# Altium PCB WX0.012.817PCB-4.1.PcbDoc
Units mil, origin at the board's own origin, x right, y up, seen from the top; angles counter-clockwise.
Board outline 4685.04 x 1692.91 mil, 2 copper layers (Top Layer, Bottom Layer); 24 components, 15 nets, 67 pads, 117 vias.
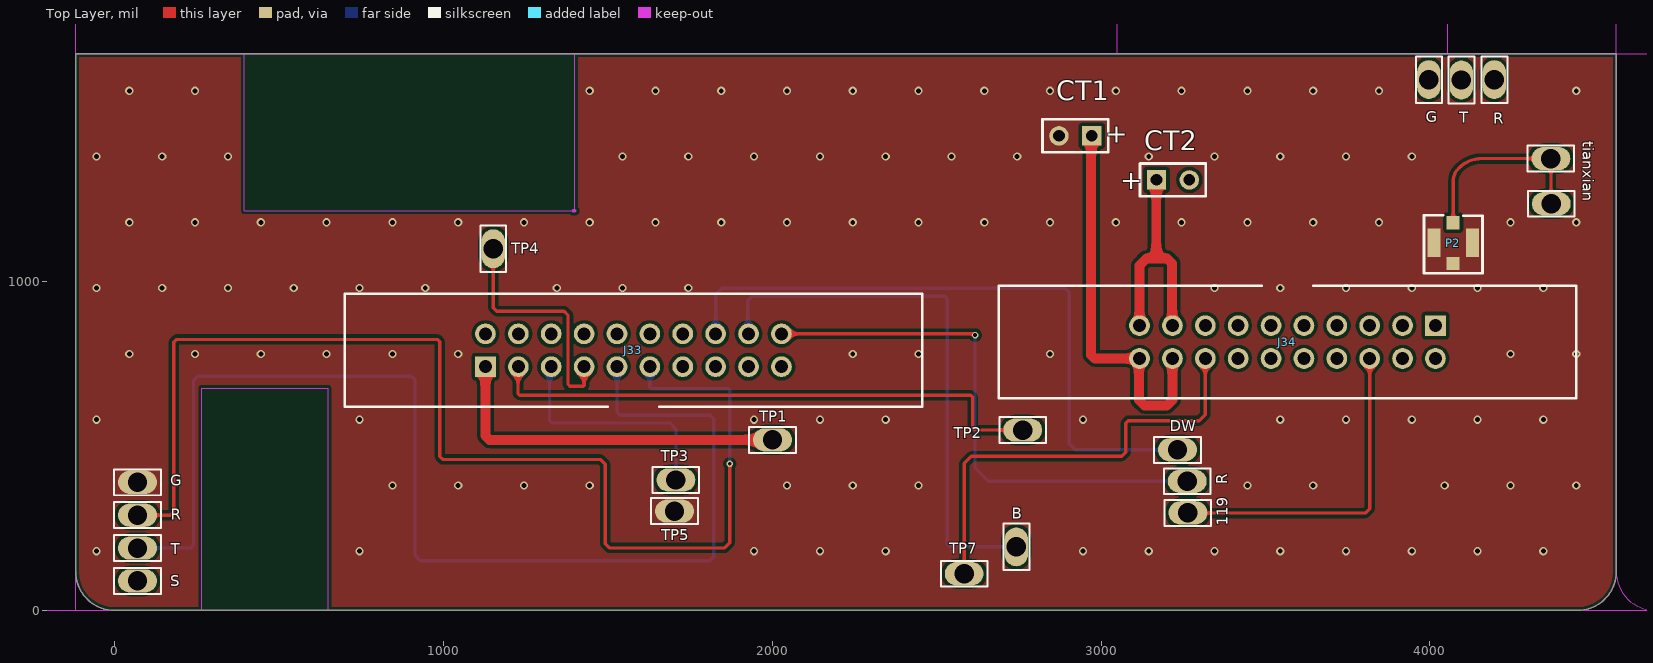
[diagram p0: Top Layer view]
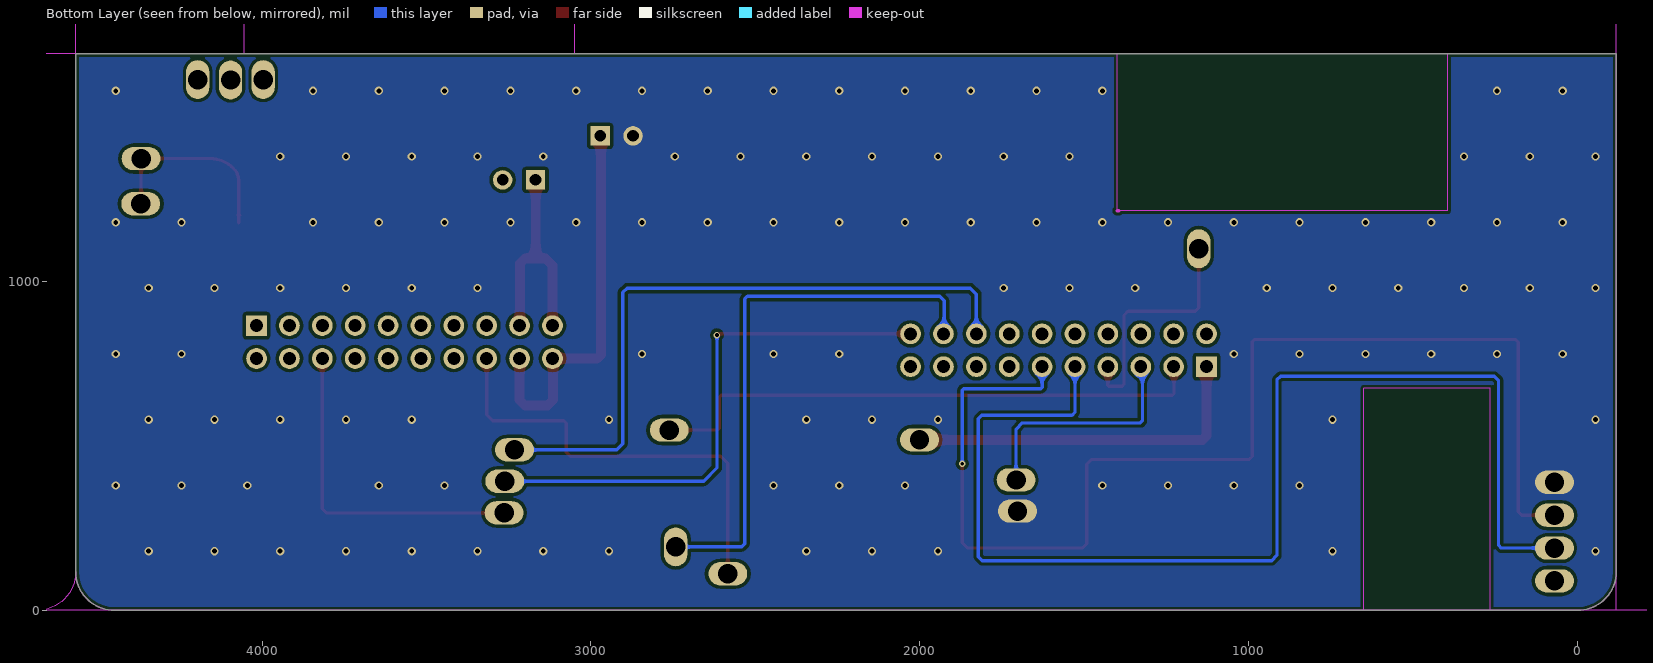
[diagram p1: Bottom Layer view, seen from below]

## Layer stack, top to bottom
Top Solder: solder mask 0.4, Solder Resist, Dk 3.5
Top Layer: signal copper 1.4
Dielectric 1: dielectric 12.6, FR-4, Dk 4.8
Bottom Layer: signal copper 1.4
Bottom Solder: solder mask 0.4, Solder Resist, Dk 3.5

## Board outline
0,0 cw(c0,118.11) -118.11,118.11 -118.11,1692.91 4566.93,1692.91 4566.93,118.11 cw(c4448.82,118.11) 4448.82,0

## Design rules (kind name [scope] priority, off if disabled: settings)
Clearance [All] p1: gap=10 ignorepadtopadclearanceinfootprint=TRUE except(0: Arc-Hole Track-Hole SMDPad-Hole THPad-Hole Via-Hole Fill-Hole Poly-Hole Region-Hole Text-Hole)
HoleToHoleClearance [All] p1: gap=3 allowstackedmicrovias=TRUE
MinimumSolderMaskSliver [All] p1: minsoldermaskwidth=3
PlaneConnect [All] p1: planeconnectstyle=Direct reliefexpansion=20 reliefentries=4 reliefconductorwidth=10 reliefairgap=10
PolygonConnect [All] p1: connectstyle=Direct reliefconductorwidth=10 reliefentries=4 polygonreliefangle="90 Angle" airgapwidth=10
RoutingVias [All] p1: holewidth=11.81 width=19.68 viastyle="Through Hole" minholewidth=10 minwidth=10 maxholewidth=28 maxwidth=50
SilkToSilkClearance [All] p1: silktosilkclearance=3
SilkToSolderMaskClearance [IsPad] p1: minsilkscreentomaskgap=0 clearancetoexposedcopper=TRUE
SolderMaskExpansion [All] p1: expansion=4
Width [All] p1: maxlimit=50 minlimit=10 preferedwidth=10
25 further rules are at their usual default settings.

## Components (designator, comment, footprint, x,y, rotation, side; value= is the part's Value field where it differs from the comment)
119 "Test Point" TP5 3264.2,296.62 r270 top (schematic designator TP7)
B "Test Point" TP5 2742.39,193.2 r0 top (schematic designator TP7)
CT1 "BAT" BAT2 2921.53,1443.05 r180 top
CT2 "BAT" BAT2 3219,1309 r0 top (schematic designator CT1)
DW "Test Point" TP5 3232.39,488.2 r90 top (schematic designator TP7)
G "Test Point" TP5 69.82,389.53 r270 top (schematic designator TP7)
G "Test Point" TP5 3997,1614 r180 top (schematic designator TP7)
J33 "20Pin" DC254_2*10 1578,791 r90 top
J34 "20Pin" DC254_2*10 3567,816 r270 top (schematic designator J33)
P2 "IPEX" ANT-IPEX 4070.93,1179.02 r180 top (schematic designator P1)
R "Test Point" TP5 3262.2,392.62 r270 top (schematic designator TP7)
R "Test Point" TP5 69.82,289.53 r270 top (schematic designator TP7)
R "Test Point" TP5 4196,1614 r180 top (schematic designator TP7)
S "Test Point" TP5 69.82,89.53 r270 top (schematic designator TP7)
T "Test Point" TP5 69.82,189.53 r270 top (schematic designator TP7)
T "Test Point" TP5 4096,1613 r180 top (schematic designator TP7)
tianxian "Test Point" TP5 4368,1374 r270 top (schematic designator TP7)
TP1 "Test Point" TP5 2000.8,518.38 r90 top (schematic designator TP7)
TP2 "Test Point" TP5 2761.8,548.38 r90 top (schematic designator TP7)
TP3 "Test Point" TP5 1707.2,396.62 r270 top (schematic designator TP7)
TP4 "Test Point" TP5 1151.61,1099.8 r180 top (schematic designator TP7)
TP5 "Test Point" TP5 1703,302 r270 top (schematic designator TP7)
TP7 "Test Point" TP5 2583.8,111.38 r90 top
TP7 "Test Point" TP5 4369.2,1236.61 r270 top

## Footprints (in the part's own frame and the unit in brackets; to place one, negate y for a bottom-side part, rotate by r counter-clockwise, add the part's x,y. Pads: shape width x height; smd on the part's side, far side on the other; paste and mask are expansions set on the pad)
ANT-IPEX [mm] "IPX天线座"
  rect 1x1.05 smd: 1(0,0)
  rect 1x2.2 smd: 2(-1.475,1.55) 2(1.475,1.55)
  rect 1x1 smd: 2(0,3.151)
  silkscreen extent -2.26,-0.56 2.26,3.9
BAT2 [mm]
  rect 1.5x1.5 hole 0.9: 1(-1.282,0.001)
  round 1.5 hole 0.9: 2(1.258,0.001)
  silkscreen extent -2.55,-1.27 2.53,1.27
DC254_2*10 [mm]
  rect 1.6x1.6 hole 1: 1(-1.27,11.43)
  round 1.6 hole 1: 2(1.27,11.43) 3(-1.27,8.89) 4(1.27,8.89) 5(-1.27,6.35) 6(1.27,6.35) 7(-1.27,3.81) 8(1.27,3.81) 9(-1.27,1.27) 10(1.27,1.27) 11(-1.27,-1.27) 12(1.27,-1.27) 13(-1.27,-3.81) 14(1.27,-3.81) 15(-1.27,-6.35) 16(1.27,-6.35) 17(-1.27,-8.89) 18(1.27,-8.89) 19(-1.27,-11.43) 20(1.27,-11.43)
  silkscreen extent -4.35,-22.3 4.35,22.3
TP5 [mm]
  oval 1.8x3 hole 1.5: 1(0,0)
  silkscreen extent -1,-1.8 1,1.8

## Part data
119 B DW G G R R R S T T tianxian TP1 TP2 TP3 TP4 TP5 TP7 TP7: library part "Test Point  PASS", "测试点"
CT1 CT2: "电池"
J33 J34: library part 1010902-0139, "DC2 2.54mm 2x10pin,2.54mm间距，2x10pin，32×8.55×27.5mm,母头,双排,双排牛角座", Part Name=DC牛角座, ID=4, Part Number=1010902-0139, SMD/DIP=DIP

## Via types
v1: diameter 25, hole 15, Top Layer to Bottom Layer, tented both sides, 115 vias
v2: diameter 19.68, hole 11.81, Top Layer to Bottom Layer, tented both sides, 2 vias

## Nets (pads, with @x,y where several pads share a name; then routed paths per layer and width w, separated by ;. In a path a pad name is that pad's centre, name@x,y a point inside that pad or via, vN(x,y) a via of type N, cw(c..) or ccw(c..) an arc to the next point about the centre after c; other vN are vias at no path point)
3.3V: J33.7 TP4.1 | length 736
  Top Layer w10: TP4.1 1151.61,920.39 1162,910 1367,910 1379,898 1379,687 1384,682 1426,682 1428,684 J33.7
3.6V: J34.16 TP7.1@2583.8,111.38 | length 1352.5
  Top Layer w10: TP7.1@2583.8,111.38 2583.8,446.8 2606,469 3063,469 3075,481 3075,569 3083,577 3299,577 3317,595 J34.16
5V: J33.3 TP2.1 | length 1718.1
  Top Layer w10: J33.3 1227,740 1227,659 1232,654 2604,654 2610,648 2610,554 2615.61,548.38 TP2.1
5V1: J33.5 TP3.1 | length 715.9
  Bottom Layer w10: J33.5 1323,736 1323,576 1329,570 1688,570 1707.2,550.8 TP3.1
12out2: CT2.1 J34.17 J34.19 | length 725.6
  Top Layer w30: J34.19 3117,1049 3138,1070 3168,1070 ; CT2.1 3168,1308.52 3168,1070 ; J34.17 3216,867 3216,1055 3201,1070 3168,1070
12Vout1: CT1.1 J34.18 J34.20 | length 1187.3
  Top Layer w30: CT1.1 2970,1441 2970,777 2981,766 J34.20 3115,764 3115,640 3132,623 3200,623 3217,640 J34.18
119: 119.1 J34.6 | length 1015.4
  Top Layer w10: 119.1 3264.81,296 3804,296 3817,309 J34.6
B: B.1 J33.18 | length 1675
  Bottom Layer w10: J33.18 1926,843 1926,942 1939,955 2524,955 2532,947 2532,203 2541.8,193.2 B.1
DW: DW.1 J33.16 | length 2006
  Bottom Layer w10: J33.16 1828,962 1846,980 2890,980 2903,967 2903,507 2921.8,488.2 DW.1
GND: CT1.2 G.1@69.82,389.53 P2.2 TP5.1
  other v1: -55,180 745,180 1945,180 2145,180 2345,180 2945,180 3145,180 3345,180 3545,180 3745,180 3945,180 4145,180 4345,180 845,380 1045,380 1245,380 1445,380 2045,380 2245,380 2445,380 3445,380 3645,380 4045,380 4245,380 4445,380 -55,580 745,580 1945,580 2145,580 2345,580 2945,580 3545,580 3745,580 3945,580 4145,580 4345,580 45,780 245,780 445,780 645,780 845,780 1045,780 2245,780 2445,780 2845,780 4245,780 4445,780 -55,980 145,980 345,980 545,980 745,980 945,980 1345,980 1545,980 1745,980 3345,980 3545,980 3745,980 3945,980 4145,980 4345,980 45,1180 245,1180 445,1180 645,1180 845,1180 1045,1180 1245,1180 1445,1180 1645,1180 1845,1180 2045,1180 2245,1180 2445,1180 2645,1180 2845,1180 3045,1180 3245,1180 3445,1180 3645,1180 3845,1180 4245,1180 4445,1180 -55,1380 145,1380 345,1380 1545,1380 1745,1380 1945,1380 2145,1380 2345,1380 2545,1380 2745,1380 3145,1380 3345,1380 3545,1380 3745,1380 3945,1380 45,1580 245,1580 1445,1580 1645,1580 1845,1580 2045,1580 2245,1580 2445,1580 2645,1580 2845,1580 3045,1580 3245,1580 3445,1580 3645,1580 3845,1580 4445,1580
R: J33.20 R.1@3262.2,392.62 | length 1656.6
  Top Layer w10: J33.20 2613,841 v2(2617,837)
  Bottom Layer w10: v2(2617,837) 2617,433 2657.39,392.62 R.1@3262.2,392.62
rx: J33.11 R.1@69.82,289.53 | length 3712.4
  Top Layer w10: R.1@69.82,289.53 169.53,289.53 180,300 180,815 189,824 982,824 989,817 989,468 998,459 1477,459 1492,444 1492,203 1505,190 1855,190 1871,206 v2(1871,446)
  Bottom Layer w10: J33.11 1628,678 1632,674 1867,674 1871,670 v2(1871,446)
tianxian: P2.1 tianxian.1 TP7.1@4369.2,1236.61 | length 596.2
  Top Layer w10: P2.1 4070.93,1304.2 cw(c4128.23,1304.2) 4087.71,1344.71 cw(c4158.42,1274) 4158.42,1374 tianxian.1 4368,1237.81 TP7.1@4369.2,1236.61
tx: J33.9 T.1@69.82,189.53 | length 3673.1
  Bottom Layer w10: T.1@69.82,189.53 231.53,189.53 240,198 240,699 253,712 903,712 914,701 914,167 930,151 1810,151 1822,163 1822,583 1812,593 1537,593 1528,602 J33.9
VIN: J33.1 TP1.1 | length 1091.7
  Top Layer w10: TP1.1@1998.19,521 TP1.1
  Top Layer w30: J33.1 1128,531 1140.61,518.38 TP1.1
pads on no net: CT2.2 G.1@3997,1614 J33.2 J33.4 J33.6 J33.8 J33.10 J33.12 J33.13 J33.14 J33.15 J33.17 J33.19 J34.1 J34.2 J34.3 J34.4 J34.5 J34.7 J34.8 J34.9 J34.10 J34.11 J34.12 J34.13 J34.14 J34.15 R.1@4196,1614 S.1 T.1@4096,1613

## Polygon pours and split planes (outlines as drawn)
GND on Top Layer "Top Layer-No Net" (solid, remove dead copper, pour order 0): 0,0 cw(c0,118.11) -118.11,118.11 -118.11,1692.91 4566.93,1692.91 4566.93,118.11 cw(c4448.82,118.11) 4448.82,0
GND on Bottom Layer "Top Layer-No Net1" (solid, remove dead copper, pour order 1): 0,0 cw(c0,118.11) -118.11,118.11 -118.11,1692.91 4566.93,1692.91 4566.93,118.11 cw(c4448.82,118.11) 4448.82,0

## Keep-outs
Keep-Out Layer:
  lines w0.5: -236.21,3386.11 -118.11,3386.11 ; -236.1,3386.11 -236.1,0 -118,0 ; -118.11,1693.11 -118.11,118.11 ccw(c0,118.11) 0,0 ; -118,1698.91 -118,0 ; 1395,1215 395,1215 395,1693 -118.11,1693 -118.11,3268 -118.11,3386.11 ; 1400,1215 1400,1692.91 4566.93,1692.91 4566.93,118.11 cw(c4448.82,118.11) 4448.82,0 ; 3048.78,2171.11 3048.78,1693.2 -118.15,1693.2 -118.15,3268 cw(c-0.04,3268) -0.04,3386.11 ; 3053.78,2171.11 4053.78,2171.11 4053.78,1693.11 4566.89,1693.11 4566.89,118.11 ccw(c4685,118.11) 4685,0 4950,0 ; 4353.82,3385.91 4679,3385.91 ; 4566.93,1692.8 4566.93,3267.8 ; 4774,0 4448.82,0 ; 6080,1215 5080,1215 5080,1693 4566.89,1693 ; 6085,1215 6085,1692.91 9251.93,1692.91 ; 7733.82,2170.91 7733.82,1693 4566.89,1693 ; 7738.82,2170.91 8738.82,2170.91 8738.82,1692.91 9251.93,1692.91 ; 9133.86,-0.2 9251.93,-0.2 ; 9251.82,1687 9251.82,3385.91 ; 9251.97,1692.72 9251.97,117.91 ; 9369.92,-0.2 9369.92,3385.91 9251.82,3385.91 ; 9370.03,-0.2 9251.93,-0.2 ; -118.11,3386.11 -0.04,3386.11 ; -118,0 0,0 ; -0.04,3386.11 2741.2,3386.11 3515.2,3386.11 3798.78,3386.11 ; 0,0 265,0 ; 265,0 265,675 650,675 650,0 ; 265,0 650,0 ; 650,0 933.57,0 1707.57,0 4448.82,0 ; 3798.78,3386.11 3798.78,2711.11 4183.78,2711.11 4183.78,3386.11 ; 3798.78,3386.11 4183.78,3386.11 ; 4183.78,3386.11 4448.78,3386.11 cw(c4448.78,3268) 4566.89,3268 4566.89,1693 ; 4566.89,1693 4566.89,3267.8 cw(c4685,3267.8) 4685,3385.91 7426.25,3385.91 8200.25,3385.91 8483.82,3385.91 ; 4950,0 4950,675 5335,675 5335,0 ; 4950,0 5335,0 ; 5335,0 5618.57,0 6392.57,0 9133.82,0 ccw(c9133.82,118.11) 9251.93,118.11 9251.93,1692.91 ; 8483.82,3385.91 8483.82,2710.91 8868.82,2710.91 8868.82,3385.91 ; 8483.82,3385.91 8868.82,3385.91 ; 8868.82,3385.91 9133.82,3385.91 ; 9133.82,3385.91 cw(c9133.82,3267.8) 9251.93,3267.8 ; 9133.82,3385.91 9251.82,3385.91 ; 9251.93,-0.2 9251.93,117.91 ; 9251.93,117.91 9251.93,1692.91 ; 9251.93,3267.8 9251.93,1692.8 9251.93,3267.8
  lines w10: 1395,1215 1400,1215 ; 3048.78,2171.11 3053.78,2171.11 ; 6080,1215 6085,1215 ; 7733.82,2170.91 7738.82,2170.91

## Text inside footprints (layer, text, board x,y; h text height)
CT1: Top Overlay "+" at 3081.53,1471.05 h59.06 r180
CT2: Top Overlay "+" at 3059,1281 h59.06